# Altium PCB main.pcbdoc
Units mm, origin at the board's own origin, x right, y up, seen from the top; angles counter-clockwise.
Board outline 58 x 50 mm, 4 copper layers (Top Layer, GND, PWR, Bottom Layer), stack 1.586 mm thick; 85 components, 36 nets, 360 pads, 293 vias.
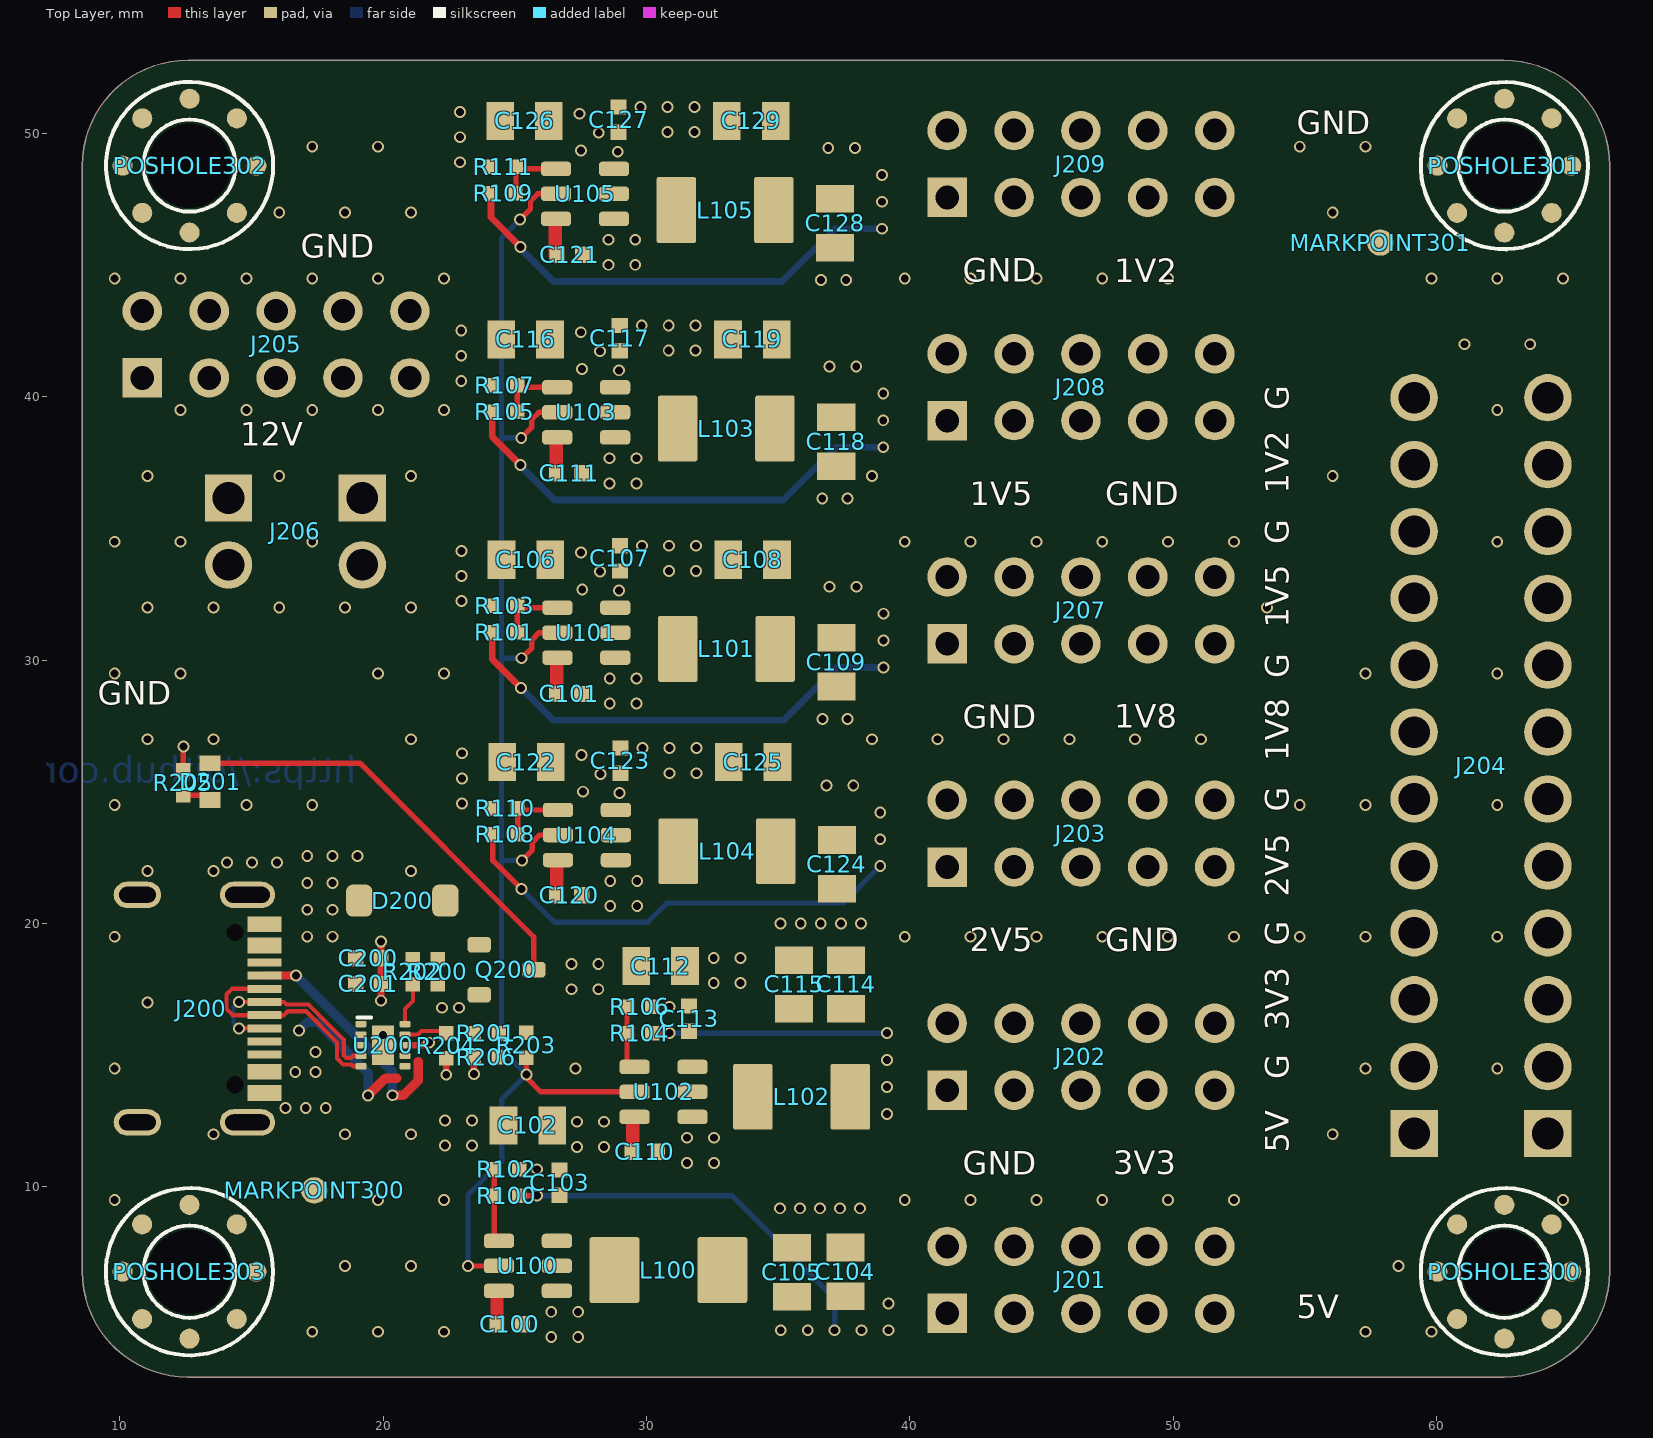
[diagram p0: Top Layer view]
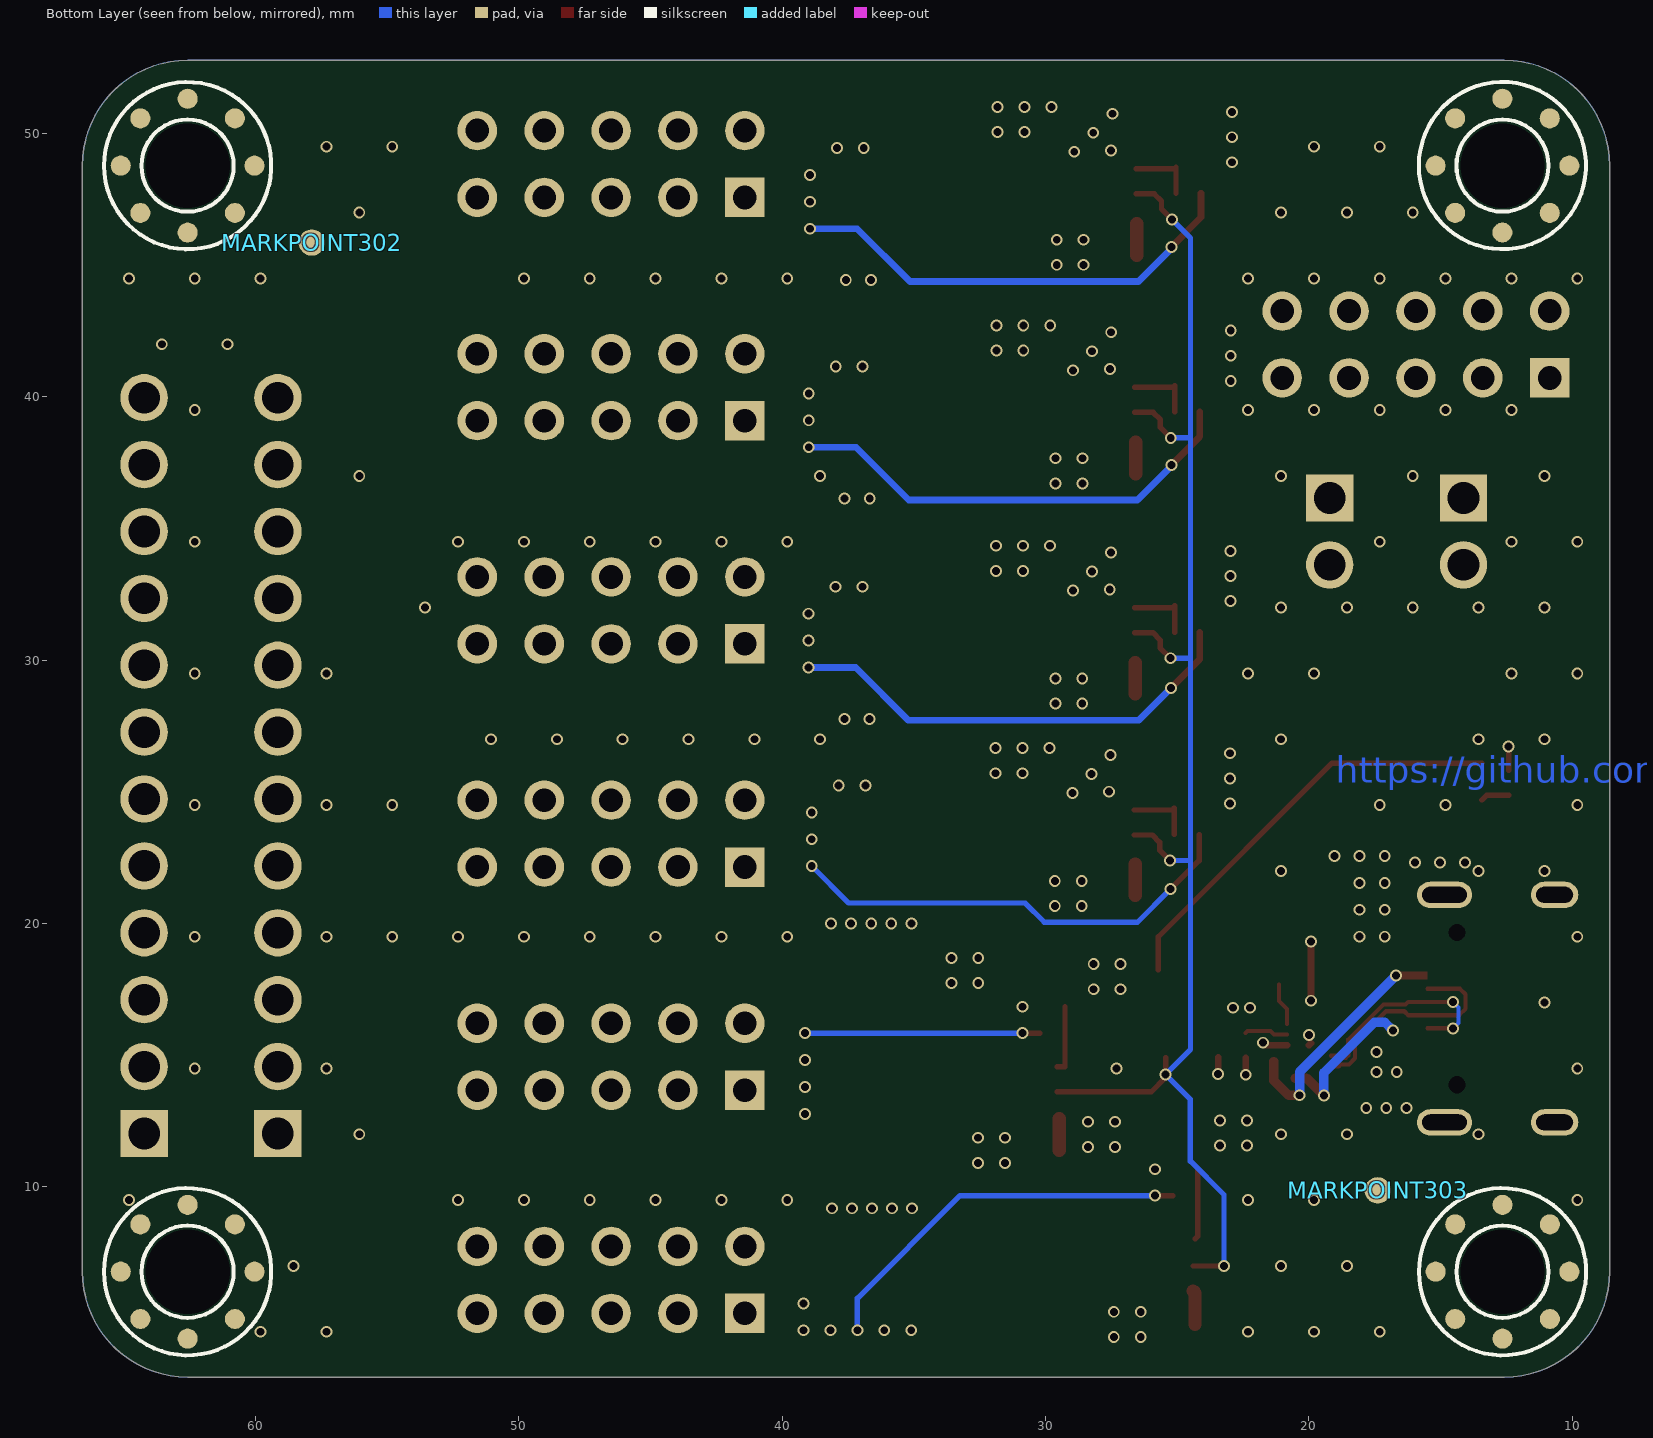
[diagram p1: Bottom Layer view, seen from below]
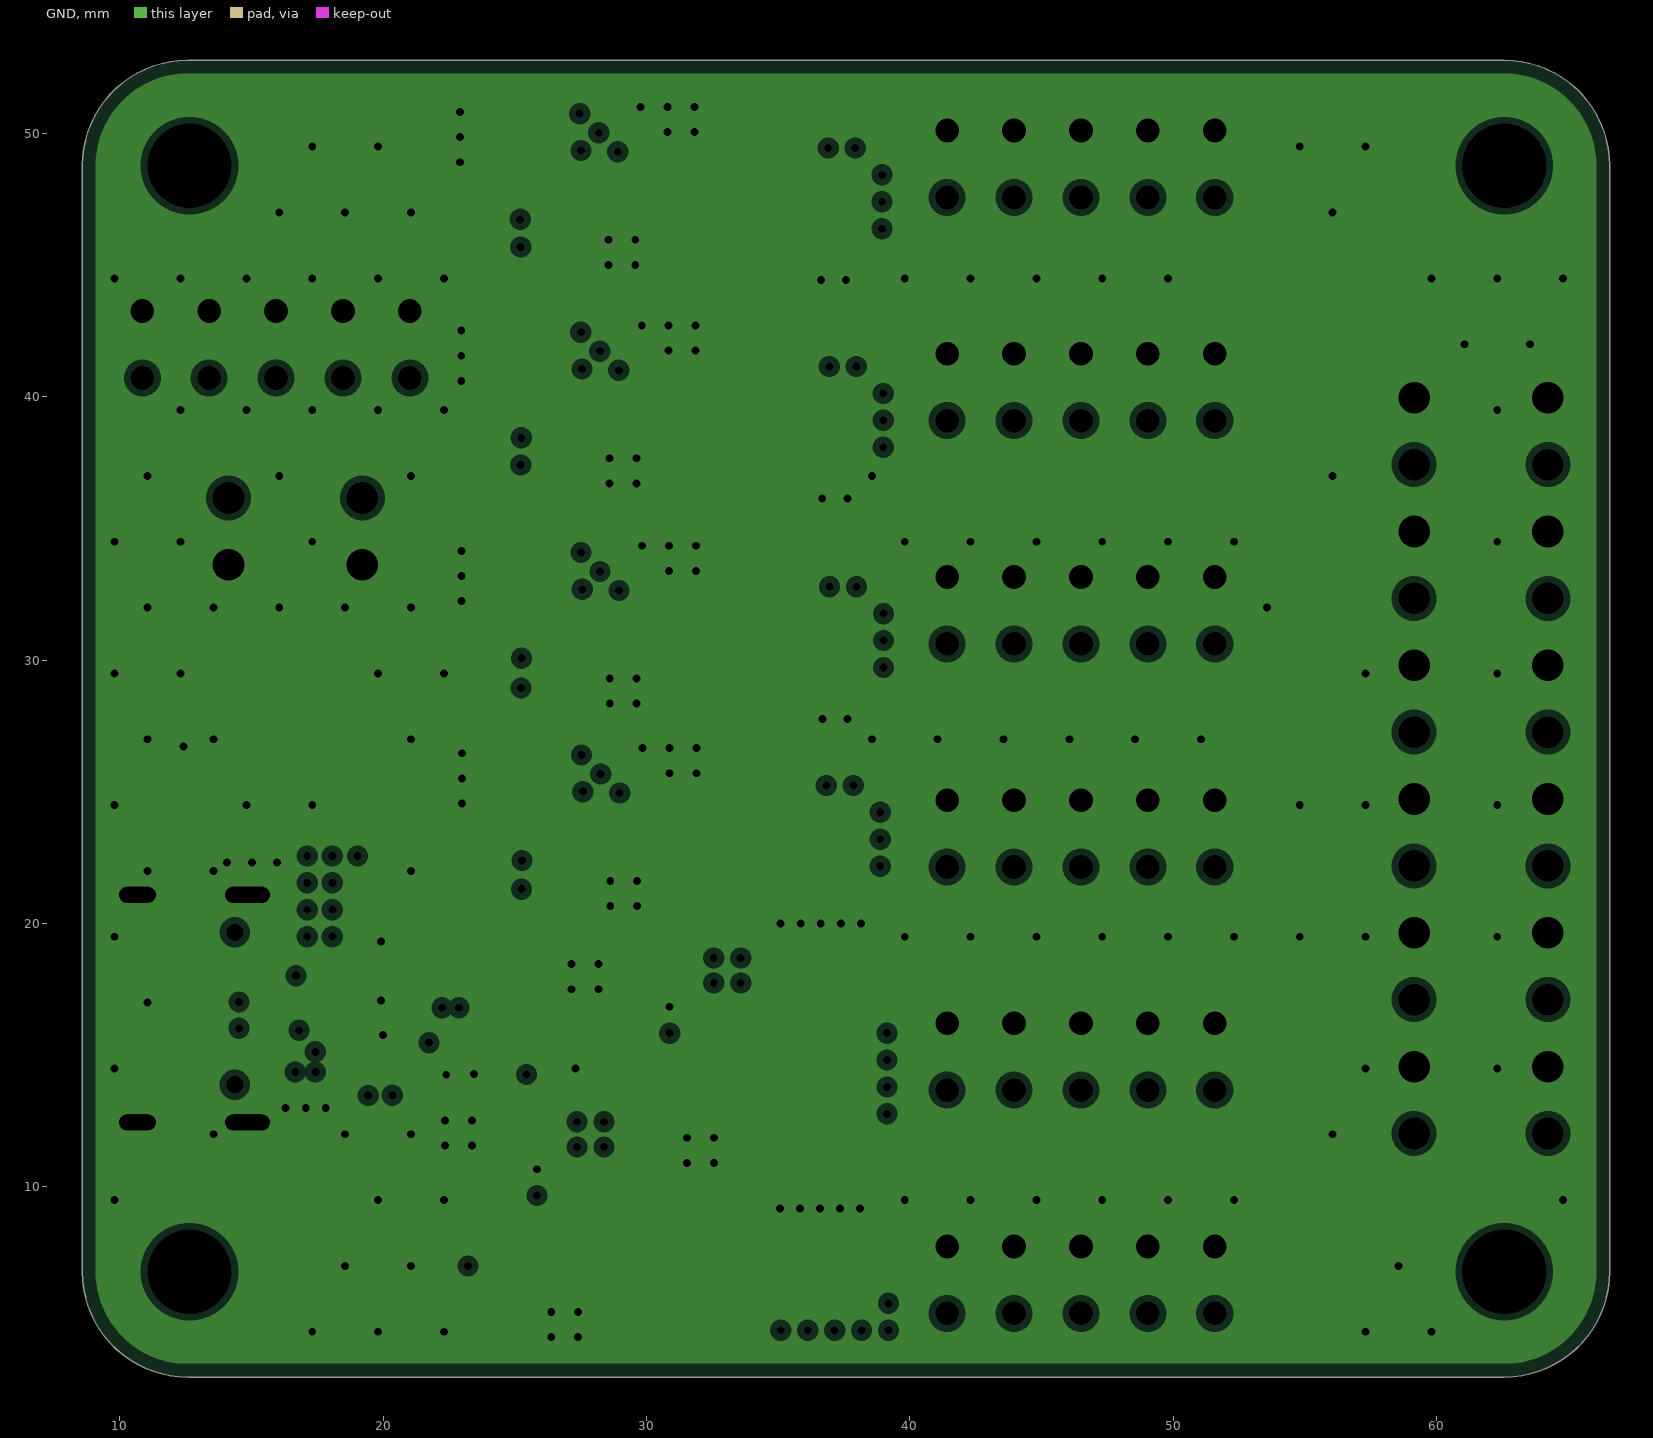
[diagram p2: GND, clearances drawn from the general rule]
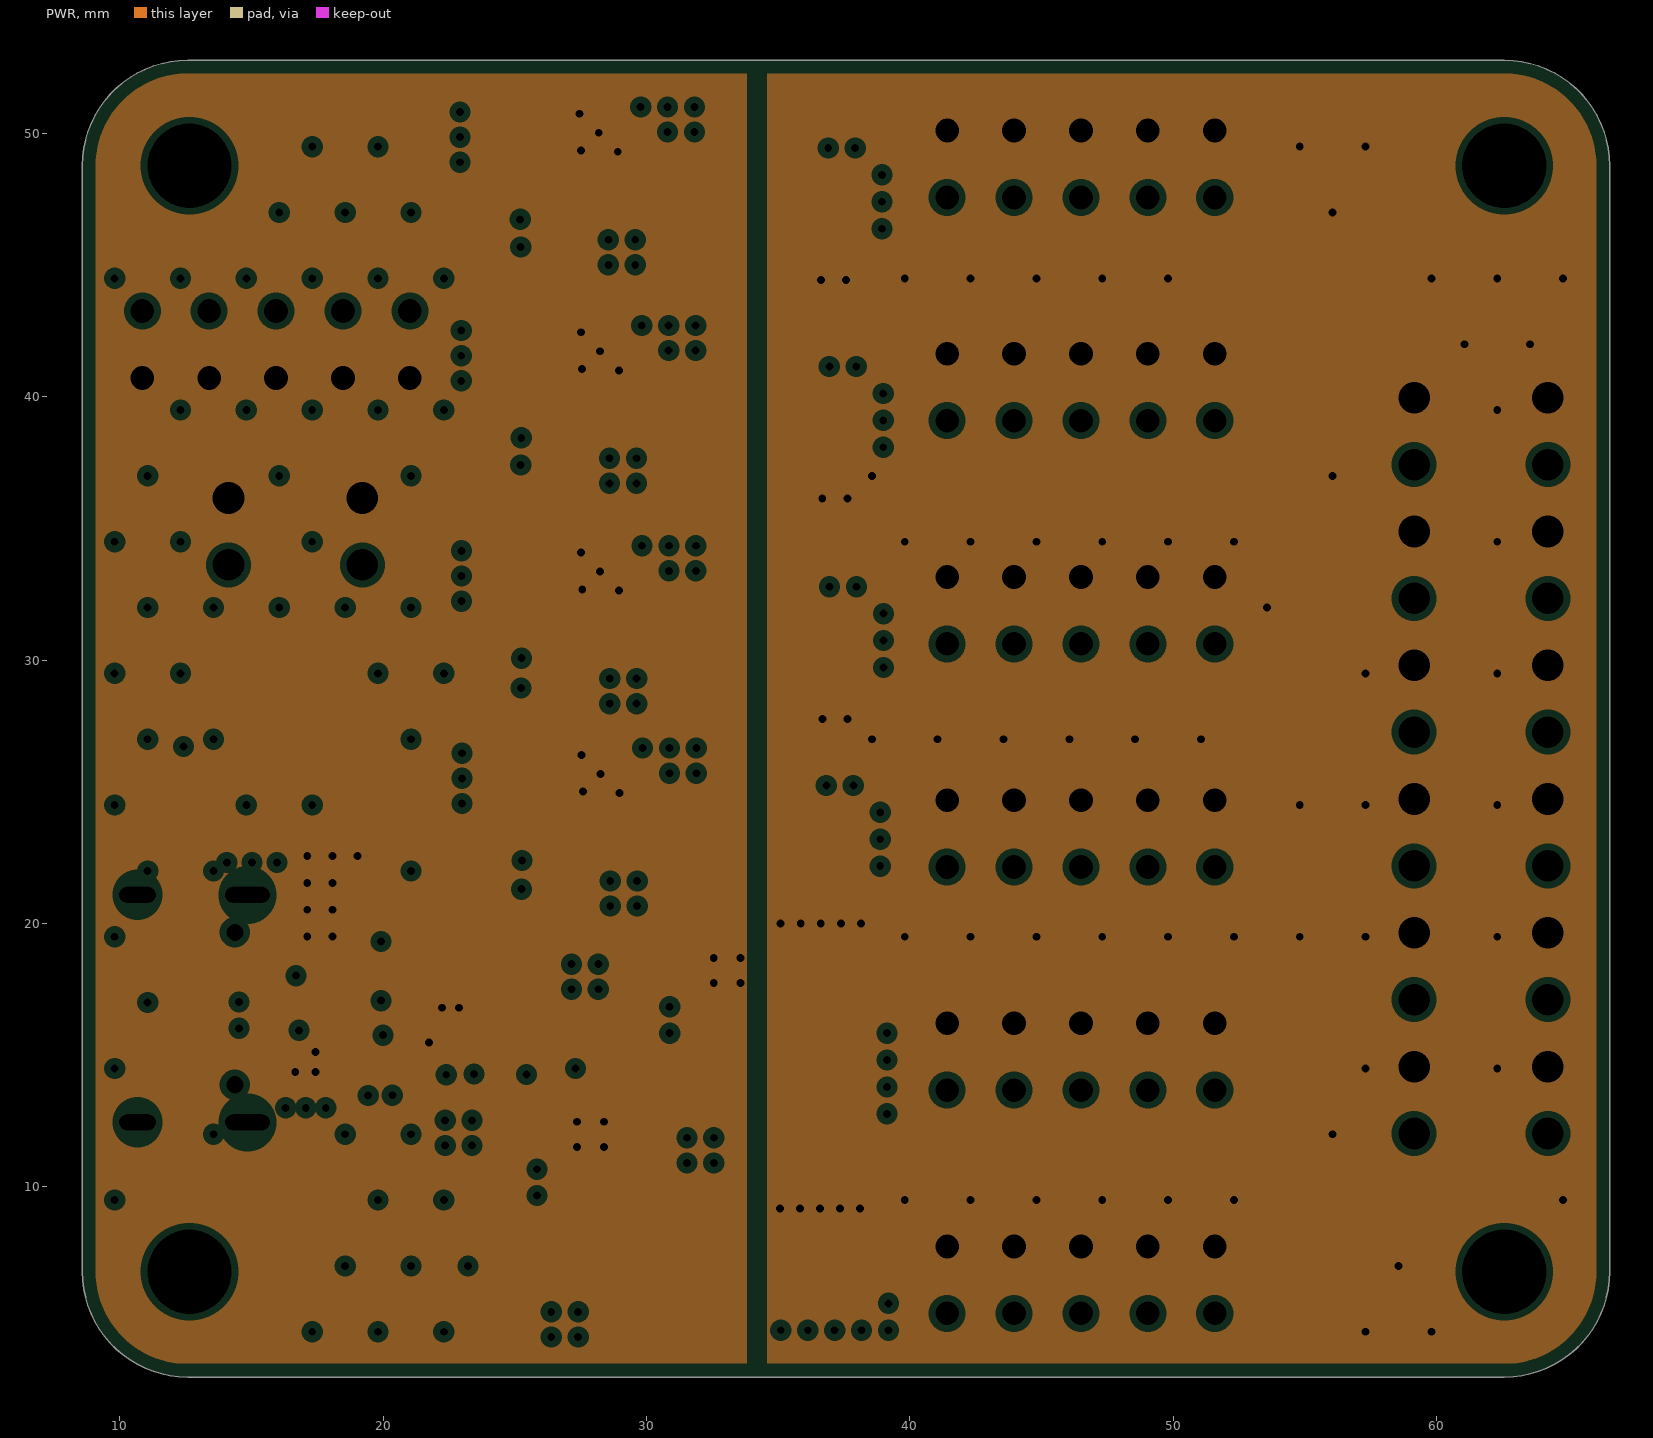
[diagram p3: PWR, clearances drawn from the general rule]

## Layer stack, top to bottom
Top Solder: solder mask 0.0102, Solder Resist, Dk 3.5
Top Layer: signal copper 0.035
Dielectric 2: prepreg 0.2104, PP-022, Dk 4.5
GND: plane copper 0.0152, net GND
Dielectric 1: core 1.065, Core-042, Dk 4.6
PWR: plane copper 0.0152, net GND
Dielectric 3: prepreg 0.2104, PP-022, Dk 4.5
Bottom Layer: signal copper 0.035
Bottom Solder: solder mask 0.0102, Solder Resist, Dk 3.5

## Board outline
8.576,6.782 8.576,48.782 cw(c12.576,48.782) 12.576,52.782 62.576,52.782 cw(c62.576,48.782) 66.576,48.782 66.576,6.782 cw(c62.576,6.782) 62.576,2.782 12.576,2.782 cw(c12.576,6.782)

## Design rules (kind name [scope] priority, off if disabled: settings)
AssemblyTestPointUsage [All] p0: scope1count=1 scope1_0_kind=Board scope1_0_value=Board scope2count=1 scope2_0_kind=Board scope2_0_value=Board commentlength=0
AssemblyTestPointUsage [All] p1: isadvanced=TRUE
AssemblyTestpoint [All] p0: scope1count=1 scope1_0_kind=Board scope1_0_value=Board scope2count=1 scope2_0_kind=Board scope2_0_value=Board commentlength=0
AssemblyTestpoint [All] p1: isadvanced=TRUE testpointundercomponent=TRUE minsize=1.016 maxsize=2.54 preferedsize=1.524 minholesize=0 maxholesize=1.016 preferedholesize=0.813 testpointgrid=0.025 usegrid=TRUE gridtolerance=0 allowsidetop=TRUE allowsidebottom=TRUE
BoardOutlineClearance BoardOutlineClearance_1 [All] p0: scope1count=1 scope1_0_kind=Board scope1_0_value=Board scope2count=1 scope2_0_kind=Board scope2_0_value=Board commentlength=0 gap=0.2
BoardOutlineClearance BoardOutlineClearance_1 [All] p1: isadvanced=TRUE gap=0.2 ignorepadtopadclearanceinfootprint=FALSE
Clearance "" [All] p0: scope1count=1 scope1_0_kind=Board scope1_0_value=Board scope2count=1 scope2_0_kind=Board scope2_0_value=Board commentlength=0
Clearance Clearance_3 [InPolygon] p1: scope1count=1 scope1_0_kind=Board scope1_0_value=Board scope2count=1 scope2_0_kind=Board scope2_0_value=Board commentlength=0 allowed="FALSE / RECORD=DXPRule" id=0 isadvanced=TRUE gap=0.381 ignorepadtopadclearanceinfootprint=FALSE
Clearance Clearance_1 [OnMid vs OnMid] p2: scope1count=1 scope1_0_kind=Board scope1_0_value=Board scope2count=1 scope2_0_kind=Board scope2_0_value=Board commentlength=0 id=0 gap=0.1 ignorepadtopadclearanceinfootprint=FALSE except(0.089: Arc-Arc Arc-Track Arc-Text Track-Track Track-Text Text-Text Hole-Hole) sourcerule=52 cellrowname=All cellrowtype=0 cellcolname=All cellcoltype=0 innerlayers=TRUE
Clearance Clearance_2 [(ExistsOnLayer('Top Layer') Or ExistsOnLayer('Bottom Layer')) vs (ExistsOnLayer('Top Layer') Or ExistsOnLayer('Bottom Layer'))] p3: scope1count=1 scope1_0_kind=Board scope1_0_value=Board scope2count=1 scope2_0_kind=Board scope2_0_value=Board commentlength=0 id=0 gap=0.1 ignorepadtopadclearanceinfootprint=FALSE except(0.089: Arc-Arc Arc-Track Arc-Text Track-Track Track-Text Text-Text Hole-Hole) sourcerule=52 cellrowname=All cellrowtype=0 cellcolname=All cellcoltype=0 outerlayers=TRUE
Clearance [All] p4: scope1count=1 scope1_0_kind=Board scope1_0_value=Board scope2count=1 scope2_0_kind=Board scope2_0_value=Board commentlength=0 id=0 gap=0.254 ignorepadtopadclearanceinfootprint=FALSE ismatrix=TRUE
ComponentClearance [All] p0 off: scope1count=1 scope1_0_kind=Board scope1_0_value=Board scope2count=1 scope2_0_kind=Board scope2_0_value=Board commentlength=0 gap=0 collisioncheckmode=3
ComponentClearance [All] p1 off: isadvanced=TRUE gap=0 collisioncheckmode=3 verticalgap=0.254 showdistances=FALSE
DiffPairsRouting DifferentialPairsRouting_1 [All] p0 off: scope1count=1 scope1_0_kind=Board scope1_0_value=Board scope2count=1 scope2_0_kind=Board scope2_0_value=Board commentlength=69 // Protel DXP Scope 1 Expression Was: InDifferentialPairClass('USB')
DiffPairsRouting [All] p0: scope1count=1 scope1_0_kind=Board scope1_0_value=Board scope2count=1 scope2_0_kind=Board scope2_0_value=Board commentlength=0
DiffPairsRouting DifferentialPairsRouting_1 [InDifferentialPairClass('USB')] p1: maxlimit=0.095 minlimit=0.095 mostfreqgap=0.095 toplayer_minwidth=0.16 toplayer_maxwidth=0.16 toplayer_prefwidth=0.16 bottomlayer_minwidth=0.16 bottomlayer_maxwidth=0.16 bottomlayer_prefwidth=0.16 impedanceprofiledriven=TRUE impedanceprofileid={5BC8230A-77DA-4D98-BB56-6723C76F3465} impedanceprofilevalue=90.000000 maxuncoupledlength=0.254
DiffPairsRouting [All] p2: maxlimit=0.254 minlimit=0.254 mostfreqgap=0.254 toplayer_minwidth=0.381 toplayer_maxwidth=0.381 toplayer_prefwidth=0.381 bottomlayer_minwidth=0.381 bottomlayer_maxwidth=0.381 bottomlayer_prefwidth=0.381 maxuncoupledlength=12.7
FabricationTestPointUsage [All] p0: scope1count=1 scope1_0_kind=Board scope1_0_value=Board scope2count=1 scope2_0_kind=Board scope2_0_value=Board commentlength=0 valid=0 allowmultiple=FALSE
FabricationTestPointUsage [All] p1: isadvanced=TRUE valid=0 allowmultiple=FALSE
FabricationTestpoint [All] p0: scope1count=1 scope1_0_kind=Board scope1_0_value=Board scope2count=1 scope2_0_kind=Board scope2_0_value=Board commentlength=0 side=3 testpointundercomponent=TRUE minsize=1.016 maxsize=2.54 preferedsize=1.524 minholesize=0 maxholesize=1.016 preferedholesize=0.813 testpointgrid=0.025
FabricationTestpoint [All] p1: isadvanced=TRUE side=3 testpointundercomponent=TRUE minsize=1.016 maxsize=2.54 preferedsize=1.524 minholesize=0 maxholesize=1.016 preferedholesize=0.813 testpointgrid=0.025 allowsidetop=TRUE allowsidebottom=TRUE usegrid=TRUE gridtolerance=0
FanoutControl Fanout_BGA [All] p0 off: scope1count=1 scope1_0_kind=Board scope1_0_value=Board scope2count=1 scope2_0_kind=Board scope2_0_value=Board commentlength=69 // Protel DXP Scope 1 Expression Was: IsBGA   Fanout_BGA (Default Rule)
FanoutControl Fanout_LCC [All] p0 off: scope1count=1 scope1_0_kind=Board scope1_0_value=Board scope2count=1 scope2_0_kind=Board scope2_0_value=Board commentlength=69 // Protel DXP Scope 1 Expression Was: IsLCC   Fanout_LCC (Default Rule)
FanoutControl Fanout_SOIC [All] p0 off: scope1count=1 scope1_0_kind=Board scope1_0_value=Board scope2count=1 scope2_0_kind=Board scope2_0_value=Board commentlength=71 // Protel DXP Scope 1 Expression Was: IsSOIC   Fanout_SOIC (Default Rule)
FanoutControl Fanout_Small [All] p0 off: scope1count=1 scope1_0_kind=Board scope1_0_value=Board scope2count=1 scope2_0_kind=Board scope2_0_value=Board commentlength=84 // Protel DXP Scope 1 Expression Was: (CompPinCount < 5)   Fanout_Small (Default Rule)
FanoutControl Fanout_Default [All] p0: scope1count=1 scope1_0_kind=Board scope1_0_value=Board scope2count=1 scope2_0_kind=Board scope2_0_value=Board commentlength=30 // Fanout_Default (Default Rule)
FanoutControl Fanout_BGA [IsBGA] p1: isadvanced=TRUE bgadir=Out bgaviamode=Centered fanoutstyle=Auto fanoutdirection=Alternating viagrid=0.025 // Fanout_BGA (Default Rule)
FanoutControl Fanout_LCC [IsLCC] p2: isadvanced=TRUE bgadir=Out bgaviamode=Centered fanoutstyle=Auto fanoutdirection=Alternating viagrid=0.025 // Fanout_LCC (Default Rule)
FanoutControl Fanout_SOIC [IsSOIC] p3: isadvanced=TRUE bgadir=Out bgaviamode=Centered fanoutstyle=Auto fanoutdirection=Alternating viagrid=0.025 // Fanout_SOIC (Default Rule)
FanoutControl Fanout_Small [(CompPinCount < 5)] p4: isadvanced=TRUE bgadir=Out bgaviamode=Centered fanoutstyle=Auto fanoutdirection=OutThenIn viagrid=0.025 // Fanout_Small (Default Rule)
FanoutControl Fanout_Default [All] p5: isadvanced=TRUE bgadir=Out bgaviamode=Centered fanoutstyle=Auto fanoutdirection=Alternating viagrid=0.025 // Fanout_Default (Default Rule)
Height [All] p0 off: scope1count=1 scope1_0_kind=Board scope1_0_value=Board scope2count=1 scope2_0_kind=Board scope2_0_value=Board commentlength=0
Height [All] p1 off: isadvanced=TRUE minheight=0 maxheight=25.4 prefheight=12.7
HoleSize [All] p0: scope1count=1 scope1_0_kind=Board scope1_0_value=Board scope2count=1 scope2_0_kind=Board scope2_0_value=Board commentlength=0 absolutevalues=TRUE maxlimit=6.5 minlimit=0.3 maxpercent=80.000 minpercent=20.000
HoleSize [All] p1: isadvanced=TRUE absolutevalues=TRUE maxlimit=6.5 minlimit=0.3 maxpercent=80.000 minpercent=20.000
HoleToHoleClearance [All] p0: scope1count=1 scope1_0_kind=Board scope1_0_value=Board scope2count=1 scope2_0_kind=Board scope2_0_value=Board commentlength=0
HoleToHoleClearance [All] p1: isadvanced=TRUE gap=0.15 allowstackedmicrovias=TRUE
LayerPairs [All] p0: scope1count=1 scope1_0_kind=Board scope1_0_value=Board scope2count=1 scope2_0_kind=Board scope2_0_value=Board commentlength=0 enforce=TRUE
LayerPairs [All] p1: isadvanced=TRUE enforce=TRUE
MatchedLengths MatchedLengths_2 [All] p0 off: scope1count=1 scope1_0_kind=Board scope1_0_value=Board scope2count=1 scope2_0_kind=Board scope2_0_value=Board commentlength=69 tolerance=0.254 amplitude=5.08 gap=0.508 style=90-Degree // Protel DXP Scope 1 Expression Was: InDifferentialPairClass('USB')
MatchedLengths MatchedLengths_1 [All] p0 off: scope1count=1 scope1_0_kind=NetClass scope1_0_value=NewClassCC scope2count=1 scope2_0_kind=Board scope2_0_value=Board commentlength=0 tolerance=1.27 amplitude=5.08 gap=0.508 style=90-Degree
MatchedLengths MatchedLengths_1 [InNetClass('NewClassCC')] p1 off: isadvanced=TRUE tolerance=1.27 checknetsindiffpair=FALSE checkdiffpairvsdiffpair=TRUE checkxsignals=TRUE checkothers=TRUE
MatchedLengths MatchedLengths_2 [InDifferentialPairClass('USB')] p2: tolerance=0.254 checknetsindiffpair=TRUE checkdiffpairvsdiffpair=FALSE checkxsignals=FALSE checkothers=FALSE
MinimumAnnularRing MinimumAnnularRing_1 [All] p0: scope1count=1 scope1_0_kind=Board scope1_0_value=Board scope2count=1 scope2_0_kind=Board scope2_0_value=Board commentlength=0 minimumring=0.05
MinimumAnnularRing MinimumAnnularRing_1 [All] p1: isadvanced=TRUE minimumring=0.05
MinimumSolderMaskSliver [All] p0: scope1count=1 scope1_0_kind=Board scope1_0_value=Board scope2count=1 scope2_0_kind=Board scope2_0_value=Board commentlength=0
MinimumSolderMaskSliver [All] p1: isadvanced=TRUE minsoldermaskwidth=0.1
NetAntennae [All] p0: scope1count=1 scope1_0_kind=Board scope1_0_value=Board scope2count=1 scope2_0_kind=Board scope2_0_value=Board commentlength=0
NetAntennae [All] p1: isadvanced=TRUE netantennaetolerance=0
PasteMaskExpansion [All] p0: scope1count=1 scope1_0_kind=Board scope1_0_value=Board scope2count=1 scope2_0_kind=Board scope2_0_value=Board commentlength=0 expansion=0
PasteMaskExpansion [All] p1: isadvanced=TRUE expansion=0
PlaneClearance [All] p0: scope1count=1 scope1_0_kind=Board scope1_0_value=Board scope2count=1 scope2_0_kind=Board scope2_0_value=Board commentlength=0 clearance=0.254
PlaneClearance [All] p1: isadvanced=TRUE clearance=0.254
PlaneConnect [All] p0: scope1count=1 scope1_0_kind=Board scope1_0_value=Board scope2count=1 scope2_0_kind=Board scope2_0_value=Board commentlength=0 planeconnectstyle=Direct reliefexpansion=0.508 reliefentries=4 reliefconductorwidth=0.254 reliefairgap=0.254
PlaneConnect [All] p1: isadvanced=TRUE planeconnectstyle=Direct reliefexpansion=0.508 reliefentries=4 reliefconductorwidth=0.254 reliefairgap=0.254
PolygonConnect [All] p0: scope1count=1 scope1_0_kind=Board scope1_0_value=Board scope2count=1 scope2_0_kind=Board scope2_0_value=Board commentlength=0 connectstyle=Direct reliefconductorwidth=0.254 reliefentries=4 polygonreliefangle="90 Angle"
PolygonConnect [All] p1: connectstyle=Direct reliefconductorwidth=0.254 reliefentries=4 polygonreliefangle="90 Angle" airgapwidth=0.254
RoutingCorners [All] p0: scope1count=1 scope1_0_kind=Board scope1_0_value=Board scope2count=1 scope2_0_kind=Board scope2_0_value=Board commentlength=0 cornerstyle=45-Degree minsetback=2.54 maxsetback=2.54
RoutingCorners [All] p1: isadvanced=TRUE cornerstyle=45-Degree minsetback=2.54 maxsetback=2.54
RoutingLayers [All] p0: scope1count=1 scope1_0_kind=Board scope1_0_value=Board scope2count=1 scope2_0_kind=Board scope2_0_value=Board commentlength=0 top layer=Automatic bottom layer=Automatic
RoutingPriority [All] p0: scope1count=1 scope1_0_kind=Board scope1_0_value=Board scope2count=1 scope2_0_kind=Board scope2_0_value=Board commentlength=0
RoutingPriority [All] p1: isadvanced=TRUE routingpriority=0
RoutingTopology [All] p0: scope1count=1 scope1_0_kind=Board scope1_0_value=Board scope2count=1 scope2_0_kind=Board scope2_0_value=Board commentlength=0 topology=Shortest
RoutingVias RoutingViaStyle_1 [All] p0: scope1count=1 scope1_0_kind=Board scope1_0_value=Board scope2count=1 scope2_0_kind=Board scope2_0_value=Board commentlength=0 holewidth=0.3 width=0.45 viastyle="Through Hole" minholewidth=0.3 minwidth=0.45 maxholewidth=0.3 maxwidth=0.45
RoutingVias RoutingViaStyle_1 [All] p1: holewidth=0.3 width=0.45 viastyle="Through Hole" minholewidth=0.3 minwidth=0.45 maxholewidth=0.3 maxwidth=0.45
ShortCircuit [All] p1: isadvanced=TRUE allowed=FALSE
SilkToBoardRegionClearance [All] p0: scope1count=1 scope1_0_kind=Board scope1_0_value=Board scope2count=1 scope2_0_kind=Board scope2_0_value=Board commentlength=0
SilkToSilkClearance [All] p0 off: scope1count=1 scope1_0_kind=Board scope1_0_value=Board scope2count=1 scope2_0_kind=Board scope2_0_value=Board commentlength=0
SilkToSilkClearance [All] p1 off: isadvanced=TRUE silktosilkclearance=0.254
SilkToSolderMaskClearance [All] p0 off: scope1count=1 scope1_0_kind=Board scope1_0_value=Board scope2count=1 scope2_0_kind=Board scope2_0_value=Board commentlength=44 // Protel DXP Scope 1 Expression Was: IsPad
SilkToSolderMaskClearance [IsPad] p1: isadvanced=TRUE minsilkscreentomaskgap=0 clearancetoexposedcopper=FALSE
SolderMaskExpansion SolderMaskExpansion_1 [All] p0 off: scope1count=1 scope1_0_kind=Board scope1_0_value=Board scope2count=1 scope2_0_kind=Board scope2_0_value=Board commentlength=44 expansion=0 // Protel DXP Scope 1 Expression Was: IsVia
SolderMaskExpansion [All] p0: scope1count=1 scope1_0_kind=Board scope1_0_value=Board scope2count=1 scope2_0_kind=Board scope2_0_value=Board commentlength=0 expansion=0
SolderMaskExpansion SolderMaskExpansion_1 [IsVia] p1: isadvanced=TRUE expansion=0 istentingtop=TRUE useseparateexpansions=TRUE expansionbottom=0 istentingbottom=TRUE
SolderMaskExpansion [All] p2: isadvanced=TRUE expansion=0 istentingtop=FALSE
SupplyNets "Schematic Supply Nets_7" [All] p0: scope1count=1 scope1_0_kind=Net scope1_0_value=GND scope2count=1 scope2_0_kind=Board scope2_0_value=Board commentlength=0 voltage=0.000
SupplyNets "Schematic Supply Nets_6" [All] p0: scope1count=1 scope1_0_kind=Net scope1_0_value=VBUS scope2count=1 scope2_0_kind=Board scope2_0_value=Board commentlength=0 voltage=12.00
SupplyNets "Schematic Supply Nets_5" [All] p0: scope1count=1 scope1_0_kind=Net scope1_0_value=+2V5 scope2count=1 scope2_0_kind=Board scope2_0_value=Board commentlength=0 voltage=2.500
SupplyNets "Schematic Supply Nets_4" [All] p0: scope1count=1 scope1_0_kind=Net scope1_0_value=+1V2 scope2count=1 scope2_0_kind=Board scope2_0_value=Board commentlength=0 voltage=1.200
SupplyNets "Schematic Supply Nets_3" [All] p0: scope1count=1 scope1_0_kind=Net scope1_0_value=+1V8 scope2count=1 scope2_0_kind=Board scope2_0_value=Board commentlength=0 voltage=1.800
SupplyNets "Schematic Supply Nets_2" [All] p0: scope1count=1 scope1_0_kind=Net scope1_0_value=+5V scope2count=1 scope2_0_kind=Board scope2_0_value=Board commentlength=0 voltage=5.000
SupplyNets "Schematic Supply Nets_1" [All] p0: scope1count=1 scope1_0_kind=Net scope1_0_value=+3V3 scope2count=1 scope2_0_kind=Board scope2_0_value=Board commentlength=0 voltage=3.300
SupplyNets "Schematic Supply Nets" [All] p0: scope1count=1 scope1_0_kind=Net scope1_0_value=+1V5 scope2count=1 scope2_0_kind=Board scope2_0_value=Board commentlength=0 voltage=1.500
SupplyNets "Schematic Supply Nets_7" [InNet('GND')] p1: isadvanced=TRUE voltage=0.000
SupplyNets "Schematic Supply Nets_6" [InNet('VBUS')] p2: isadvanced=TRUE voltage=12.00
SupplyNets "Schematic Supply Nets_5" [InNet('+2V5')] p3: isadvanced=TRUE voltage=2.500
SupplyNets "Schematic Supply Nets_4" [InNet('+1V2')] p4: isadvanced=TRUE voltage=1.200
SupplyNets "Schematic Supply Nets_3" [InNet('+1V8')] p5: isadvanced=TRUE voltage=1.800
SupplyNets "Schematic Supply Nets_2" [InNet('+5V')] p6: isadvanced=TRUE voltage=5.000
SupplyNets "Schematic Supply Nets_1" [InNet('+3V3')] p7: isadvanced=TRUE voltage=3.300
SupplyNets "Schematic Supply Nets" [InNet('+1V5')] p8: isadvanced=TRUE voltage=1.500
UnRoutedNet [All] p0: scope1count=1 scope1_0_kind=Board scope1_0_value=Board scope2count=1 scope2_0_kind=Board scope2_0_value=Board commentlength=0
UnRoutedNet [All] p1: isadvanced=TRUE
UnpouredPolygon [All] p0: scope1count=1 scope1_0_kind=Board scope1_0_value=Board scope2count=1 scope2_0_kind=Board scope2_0_value=Board commentlength=0
UnpouredPolygon [All] p1: isadvanced=TRUE
Width MaxMinWidth_1 [All] p0: scope1count=1 scope1_0_kind=Board scope1_0_value=Board scope2count=1 scope2_0_kind=Board scope2_0_value=Board commentlength=0 maxlimit=5454.608 minlimit=0.089 preferedwidth=0.152
Width [All] p0: scope1count=1 scope1_0_kind=NetClass scope1_0_value=NewClassCC scope2count=1 scope2_0_kind=Board scope2_0_value=Board commentlength=0 maxlimit=0.358 minlimit=0.358 preferedwidth=0.358
Width [InNetClass('NewClassCC')] p1: maxlimit=0.358 minlimit=0.358 preferedwidth=0.358 impedanceprofiledriven=TRUE impedanceprofileid={E49A0EDE-DB8A-417C-8989-1AAEC2FE40F3} impedanceprofilevalue=50.000000 minimp=50.000000 maximp=50.000000 favimp=50.000000
Width MaxMinWidth_1 [All] p2: maxlimit=5454.608 minlimit=0.089 preferedwidth=0.152 minimp=50.000000 maximp=50.000000 favimp=50.000000
3 further rules are at their usual default settings.

## Classes and differential pairs
net class NewClassCC: NetJ200_A5 NetJ200_B5
net class NewClassPWR: +1V2 +1V5 +1V8 +2V5 +3V3 +5V GND VBUS
component class sockets: C200 C201 D200 D201 J200 J201 J202 J203 J204 J205 J206 J207 J208 J209 Q200 R200 R201 R202 R203 R204 R205 R206 U200
component class misc: MARKPOINT300 MARKPOINT301 MARKPOINT302 MARKPOINT303 POSHOLE300 POSHOLE301 POSHOLE302 POSHOLE303
component class converter: C100 C101 C102 C103 C104 C105 C106 C107 C108 C109 C110 C111 C112 C113 C114 C115 C116 C117 C118 C119 C120 C121 C122 C123 C124 C125 C126 C127 C128 C129 L100 L101 L102 L103 L104 L105 R100 R101 R102 R103 R104 R105 R106 R107 R108 R109 R110 R111 U100 U101 U102 U103 U104 U105

## Components (designator, comment, footprint, x,y, rotation, side; value= is the part's Value field where it differs from the comment)
C100 "C-NOMO" C0402 24.801,4.785 r0 top
C101 "C-NOMO" C0402 27.067,28.722 r0 top
C102 "C-NOMO" C0805 25.497,12.335 r0 top
C103 "C-NOMO" C0402 26.697,10.168 r270 top
C104 "C-NOMO" C0805 37.551,6.777 r270 top
C105 "C-NOMO" C0805 35.523,6.76 r270 top
C106 "C-NOMO" C0805 25.421,33.819 r0 top
C107 "C-NOMO" C0402 28.992,33.869 r270 top
C108 "C-NOMO" C0805 34.03,33.819 r0 top
C109 "C-NOMO" C0805 37.211,29.931 r90 top
C110 "C-NOMO" C0402 29.938,11.342 r0 top
C111 "C-NOMO" C0402 27.067,37.096 r0 top
C112 "C-NOMO" C0805 30.537,18.389 r0 top
C113 "C-NOMO" C0402 31.618,16.389 r270 top
C114 "C-NOMO" C0805 37.581,17.689 r270 top
C115 "C-NOMO" C0805 35.604,17.689 r270 top
C116 "C-NOMO" C0805 25.413,42.184 r0 top
C117 "C-NOMO" C0402 28.984,42.234 r270 top
C118 "C-NOMO" C0805 37.203,38.296 r90 top
C119 "C-NOMO" C0805 34.022,42.184 r0 top
C120 "C-NOMO" C0402 27.067,21.072 r0 top
C121 "C-NOMO" C0402 27.093,45.394 r0 top
C122 "C-NOMO" C0805 25.442,26.134 r0 top
C123 "C-NOMO" C0402 29.013,26.184 r270 top
C124 "C-NOMO" C0805 37.232,22.247 r90 top
C125 "C-NOMO" C0805 34.051,26.134 r0 top
C126 "C-NOMO" C0805 25.37,50.482 r0 top
C127 "C-NOMO" C0402 28.94,50.532 r270 top
C128 "C-NOMO" C0805 37.16,46.594 r90 top
C129 "C-NOMO" C0805 33.978,50.482 r0 top
C200 "C-NOMO" C0402 19.435,18.689 r180 top
C201 "C-NOMO" C0402 19.437,17.708 r180 top
D200 "MMSZ4688" MMSZ4688 20.728,20.873 r0 top
D201 "LED" LED0603 13.429,25.392 r90 top
J200 "USB-C-16" USB-C-16 13.084,16.773 r270 top
J201 "HDR2X5" HDR2X5 46.497,6.47 r0 top
J202 "HDR2X5" HDR2X5 46.497,14.944 r0 top
J203 "HDR2X5" HDR2X5 46.497,23.419 r0 top
J204 "HDR1X12" KF141R-2.54-12P 61.689,26.001 r90 top
J205 "HDR2X5" HDR2X5 15.935,41.99 r0 top
J206 "HDR1X2" KF141R-2.54-2P 16.669,34.89 r270 top
J207 "HDR2X5" HDR2X5 46.497,31.894 r0 top
J208 "HDR2X5" HDR2X5 46.497,40.368 r0 top
J209 "HDR2X5" HDR2X5 46.497,48.843 r0 top
L100 "L" FXL0530 30.833,6.844 r0 top
L101 "L" FXL0420 33.038,30.433 r0 top
L102 "L" FXL0420 35.889,13.425 r0 top
L103 "L" FXL0420 33.03,38.798 r0 top
L104 "L" FXL0420 33.059,22.749 r0 top
L105 "L" FXL0420 32.986,47.096 r0 top
MARKPOINT300 "MARKPOINT" MARKPOINT-1.0#1 17.385,9.872 r90 top
MARKPOINT301 "MARKPOINT" MARKPOINT-1.0#1 57.862,45.86 r90 top
MARKPOINT302 "MARKPOINT" MARKPOINT-1.0#2 57.862,45.86 r90 bottom
MARKPOINT303 "MARKPOINT" MARKPOINT-1.0#2 17.385,9.872 r90 bottom
POSHOLE300 "POSHOLE" POSHOLE-3.2 62.576,6.782 r90 top
POSHOLE301 "POSHOLE" POSHOLE-3.2 62.576,48.781 r90 top
POSHOLE302 "POSHOLE" POSHOLE-3.2 12.649,48.782 r90 top
POSHOLE303 "POSHOLE" POSHOLE-3.2 12.646,6.782 r90 top
Q200 "HL2301A" HL2301A 24.682,18.251 r0 top
R100 "R" R0402 24.697,9.668 r0 top
R101 "R" R0402 24.621,31.069 r180 top
R102 "R" R0402 24.697,10.668 r180 top
R103 "R" R0402 24.621,32.069 r0 top
R104 "R" R0402 29.737,15.838 r0 top
R105 "R" R0402 24.613,39.434 r180 top
R106 "R" R0402 29.737,16.838 r180 top
R107 "R" R0402 24.613,40.434 r0 top
R108 "R" R0402 24.642,23.384 r180 top
R109 "R" R0402 24.57,47.732 r180 top
R110 "R" R0402 24.642,24.384 r0 top
R111 "R" R0402 24.57,48.732 r0 top
R200 "R" R0402 22.076,18.171 r90 top
R201 "R" R0402 23.919,15.829 r0 top
R202 "R" R0402 21.128,18.171 r90 top
R203 "R" R0402 25.441,15.381 r270 top
R204 "R" R0402 22.397,15.37 r270 top
R205 "R" R0402 12.416,25.346 r90 top
R206 "R" R0402 23.921,14.925 r180 top
U100 "TPS563201DDCR" TPS563201DDCR 25.497,7.001 r180 top
U101 "TPS563201DDCR" TPS563201DDCR 27.717,31.048 r180 top
U102 "TPS563201DDCR" TPS563201DDCR 30.648,13.609 r180 top
U103 "TPS563201DDCR" TPS563201DDCR 27.709,39.413 r180 top
U104 "TPS563201DDCR" TPS563201DDCR 27.738,23.364 r180 top
U105 "TPS563201DDCR" TPS563201DDCR 27.665,47.711 r180 top
U200 "CH224Q" CH224Q 19.995,15.383 r0 top

## Footprints (in the part's own frame and the unit in brackets; to place one, negate y for a bottom-side part, rotate by r counter-clockwise, add the part's x,y. Pads: shape width x height; smd on the part's side, far side on the other; paste and mask are expansions set on the pad)
C0402 [mm] "Chip Capacitor, 2-Leads, Body 1.00x0.50mm, IPC Medium Density"
  rect 0.58x0.62 smd: 1(-0.48,0) 2(0.48,0)
C0805 [mm] "Chip Capacitor, 2-Leads, Body 2.00x1.25mm, IPC Medium Density"
  rect 1.05x1.45 smd: 1(-0.925,0) 2(0.925,0)
CH224Q [mm] "PSON, 10-Leads, Body 2.00x2.00mm, Pitch 0.40mm, Thermal Pad 1.50x0.85mm, IPC Medium Density"
  rect 0.85x1.5 smd paste-0.195: 0(0,0)
  rrect50% 0.425x0.25 smd: 1(-0.837,0.8) 2(-0.837,0.4) 3(-0.837,0) 4(-0.837,-0.4) 5(-0.837,-0.8) 6(0.838,-0.8) 7(0.838,-0.4) 8(0.838,0) 9(0.838,0.4) 10(0.838,0.8)
  silkscreen extent -0.97,1.06 -0.46,1.06
FXL0420 [mm]
  rrect10% 1.5x2.5 smd: 1(-1.85,0) 2(1.85,0)
FXL0530 [mm]
  rrect10% 1.9x2.5 smd: 1(-2.05,0) 2(2.05,0)
HDR2X5 [mm] "Connector; Header; 5x2 Position"
  rect 1.5x1.5 hole 0.9: 1(-5.08,-1.27)
  round 1.5 hole 0.9: 2(-5.08,1.27) 3(-2.54,-1.27) 4(-2.54,1.27) 5(0,-1.27) 6(0,1.27) 7(2.54,-1.27) 8(2.54,1.27) 9(5.08,-1.27) 10(5.08,1.27)
HL2301A [mm] "SOT23, 3-Leads, Body 2.90x2.40mm, Pitch 0.95mm, IPC Medium Density"
  rrect50% 0.9x0.6 smd: D(1.037,0) G(-1.038,0.95) S(-1.038,-0.95)
KF141R-2.54-2P [mm] "Spring-loaded terminal block"
  rect 1.8x1.8 hole 1.2: 1(-1.27,2.54) 1(-1.27,-2.54)
  round 1.8 hole 1.2: 2(1.27,2.54) 2(1.27,-2.54)
KF141R-2.54-12P [mm] "Spring-loaded terminal block"
  rect 1.8x1.8 hole 1.2: 1(-13.97,-2.54) 1(-13.97,2.54)
  round 1.8 hole 1.2: 2(-11.43,-2.54) 2(-11.43,2.54) 3(-8.89,-2.54) 3(-8.89,2.54) 4(-6.35,-2.54) 4(-6.35,2.54) 5(-3.81,-2.54) 5(-3.81,2.54) 6(-1.27,2.54) 6(-1.27,-2.54) 7(1.27,2.54) 7(1.27,-2.54) 8(3.81,-2.54) 8(3.81,2.54) 9(6.35,-2.54) 9(6.35,2.54) 10(8.89,-2.54) 10(8.89,2.54) 11(11.43,-2.54) 11(11.43,2.54) 12(13.97,-2.54) 12(13.97,2.54)
LED0603 [mm] "Chip LED, 2-Leads, Body 1.60x0.80mm, IPC High Density"
  rect 0.6x0.8 smd: 1(-0.7,0) 2(0.7,0)
MARKPOINT-1.0#1 [mm]
  round 1 smd: ""(0,0)
  round 3 on Top Solder: ""(0,0)
MARKPOINT-1.0#2 [mm]
  round 1 smd: ""(0,0)
  round 3 on Bottom Solder: ""(0,0)
MMSZ4688 [mm] "TSOP, 2-Leads, Body 1.60x2.70mm, Pitch 0.80mm, IPC Medium Density"
  rrect50% 1x1.22 smd: 1(-1.635,0) 2(1.635,0)
POSHOLE-3.2 [mil] "3.2mm hole"
  round 30 smd: ""(-100,0) ""(-70.71,-70.71) ""(-70.71,70.71) ""(0,100) ""(0,-100) ""(70.71,-70.71) ""(70.71,70.71) ""(100,0)
  round 30 smd far side: ""(-100,0) ""(-70.71,-70.71) ""(-70.71,70.71) ""(0,100) ""(0,-100) ""(70.71,-70.71) ""(70.71,70.71) ""(100,0)
  round 0 hole 125.98 unplated: ""(0,0)
  silkscreen extent -125,-125 125,125
R0402 [mm] "Chip Resistor, 2-Leads, Body 1.00x0.50mm, IPC Medium Density"
  rect 0.55x0.55 smd: 1(-0.475,0) 2(0.475,0)
TPS563201DDCR [mm] "SOT23, 6-Leads, Body 2.90x2.80mm, Pitch 0.95mm, IPC High Density"
  rrect50% 1.15x0.55 smd: 1(-1.1,0.95) 2(-1.1,0) 3(-1.1,-0.95) 4(1.1,-0.95) 5(1.1,0) 6(1.1,0.95)
USB-C-16 [mm]
  rect 0.6x1.3 smd: A1B12(-3.2,2.415) A4B9(-2.4,2.415) B1A12(3.2,2.415) B4A9(2.4,2.415)
  rect 0.3x1.3 smd: A5(-1.25,2.415) A6(-0.25,2.415) A7(0.25,2.415) A8(1.25,2.415) B5(1.75,2.415) B6(0.75,2.415) B7(-0.75,2.415) B8(-1.75,2.415)
  oval 1x2.1 hole 0.6 slot 1.7 at 90 deg: EH(-4.32,1.765) EH(4.32,1.765)
  oval 1x1.8 hole 0.6 slot 1.4 at 90 deg: EH(-4.32,-2.415) EH(4.32,-2.415)
  round 0.6 hole 0.65 unplated: ""(-2.89,1.285) ""(2.89,1.285)

## Part data
D200: "ZENER"
Q200: "PMOS"
U100 U101 U102 U103 U104 U105: "BUCK"
U200: "PD3.2"

## Via types
v1: diameter 0.45, hole 0.3, Top Layer to Bottom Layer, tented both sides, 293 vias

## Nets (pads, with @x,y where several pads share a name; then routed paths per layer and width w, separated by ;. In a path a pad name is that pad's centre, name@x,y a point inside that pad or via, vN(x,y) a via of type N, cw(c..) or ccw(c..) an arc to the next point about the centre after c; other vN are vias at no path point)
+1V2: C128.2 C129.2 J204.11 J209.1 J209.3 J209.5 J209.7 J209.9 L105.2 R109.2 | length 17.6
  Top Layer w0.254: R109.2 24.095,46.821 v1(25.22,45.695)
  Bottom Layer w0.254: v1(25.22,45.695) 25.22,45.633 26.47,44.383 35.148,44.383 37.152,46.387 v1(38.945,46.387)
  other v1: 38.945,47.409 38.945,48.431 36.901,49.453 37.923,49.453
+1V5: C118.2 C119.2 J204.9 J208.1 J208.3 J208.5 J208.7 J208.9 L103.2 R105.2 | length 17.6
  Top Layer w0.254: R105.2 24.138,38.5 v1(25.22,37.418)
  Bottom Layer w0.254: v1(25.22,37.418) 25.22,37.378 26.514,36.085 35.191,36.085 37.196,38.089 v1(38.989,38.089)
  other v1: 38.989,39.111 38.989,40.133 36.944,41.155 37.967,41.155
+1V8: C108.2 C109.2 J204.7 J207.1 J207.3 J207.5 J207.7 J207.9 L101.2 R101.2 | length 17.7
  Top Layer w0.254: R101.2 24.146,30.035 v1(25.231,28.951)
  Bottom Layer w0.254: v1(25.231,28.951) 26.462,27.72 35.199,27.72 37.204,29.724 v1(38.997,29.724)
  other v1: 38.997,30.746 38.997,31.768 36.952,32.79 37.975,32.79
+2V5: C124.2 C125.2 J203.1 J203.3 J203.5 J203.7 J203.9 J204.5 L104.2 R108.2 | length 17.6
  Top Layer w0.203: R108.2 24.167,22.392 v1(25.252,21.308)
  Bottom Layer w0.203: v1(25.252,21.308) 26.507,20.053 30.043,20.053 30.772,20.782 37.477,20.782 v1(38.876,22.181)
  other v1: 38.876,23.203 38.876,24.225 36.831,25.247 37.853,25.247
+3V3: C114.2 C115.2 J202.1 J202.3 J202.5 J202.7 J202.9 J204.3 L102.2 R104.2 | length 8.9
  Top Layer w0.203: R104.2 v1@30.876,15.838
  Bottom Layer w0.203: v1(30.879,15.842) 39.057,15.842 v1@39.13,15.914
  other v1: 39.13,12.775 39.13,13.797 39.13,14.82 39.13,15.842
+5V: C104.2 C105.2 J201.1 J201.3 J201.5 J201.7 J201.9 J204.1 L100.2 R100.2 | length 14.8
  Top Layer w0.203: R100.2 25.836,9.668 v1(25.84,9.671)
  Bottom Layer w0.203: v1(25.84,9.671) 33.242,9.671 37.144,5.769 v1(37.144,4.559)
  other v1: 35.1,4.559 36.122,4.559 38.166,4.559 39.188,4.559 39.188,5.581
DM: J200.A7 J200.B7 U200.5 | length 8.6
  Top Layer w0.16: J200.B7 14.257,17.523 14.052,17.318 14.052,16.763 14.292,16.523 J200.A7 16.229,16.523 16.378,16.671 17.065,16.671 18.246,15.491 18.246,14.89 18.481,14.655 18.793,14.655 18.865,14.583 U200.5
DP: J200.A6 J200.B6 U200.4 | length 8
  Top Layer w0.16: v1(14.523,16.023) J200.B6 ; v1(14.523,17.023) J200.A6 16.229,17.023 16.326,16.927 17.171,16.927 18.501,15.596 18.501,14.995 18.586,14.91 18.793,14.91 18.865,14.983 U200.4
  Bottom Layer w0.16: v1(14.523,16.023) 14.317,16.229 14.317,16.816 v1(14.523,17.023)
EN1: R203.2 U100.5 U101.5 U102.5 U103.5 U104.5 U105.5 | length 57.7
  Top Layer w0.203: v1(23.224,7.001) U100.5 ; v1(25.202,46.742) 25.594,47.134 25.594,47.434 25.871,47.711 U105.5 ; v1(25.245,38.444) 25.637,38.836 25.637,39.136 25.915,39.413 U103.5 ; v1(25.253,30.079) 25.645,30.471 25.645,30.771 25.923,31.048 U101.5 ; v1(25.274,22.395) 25.666,22.787 25.666,23.086 25.944,23.364 U104.5 ; R203.2 25.441,14.153 25.985,13.609 U102.5
  Bottom Layer w0.203: v1(23.224,7.001) 23.224,9.705 24.497,10.978 24.497,13.328 v1(25.441,14.271) 24.493,15.219 24.493,22.4 ; v1(25.202,46.742) 24.493,46.033 24.493,38.471 ; v1(25.245,38.444) 24.52,38.444 24.493,38.471 ; v1(25.253,30.079) 24.525,30.079 24.493,30.112 ; v1(25.274,22.395) 24.497,22.395 24.493,22.4 ; 24.493,22.4 24.493,30.112 ; 24.493,30.112 24.493,38.471
GND: C102.1 C103.1 C104.1 C105.1 C106.1 C107.1 C108.1 C109.1 C112.1 C113.1 C114.1 C115.1 C116.1 C117.1 C118.1 C119.1 C122.1 C123.1 C124.1 C125.1 C126.1 C127.1 C128.1 C129.1 C200.1 C201.1 J200.A1B12 J200.B1A12 J200.EH J201.2 J201.4 J201.6 J201.8 J201.10 J202.2 J202.4 J202.6 J202.8 J202.10 J203.2 J203.4 J203.6 J203.8 J203.10 J204.2 J204.4 J204.6 J204.8 J204.10 J204.12 J205.2 J205.4 J205.6 J205.8 J205.10 J206.2 J207.2 J207.4 J207.6 J207.8 J207.10 J208.2 J208.4 J208.6 J208.8 J208.10 J209.2 J209.4 J209.6 J209.8 J209.10 R102.1 R103.1 R106.1 R107.1 R110.1 R111.1 R204.2 R205.2 R206.2 U100.1 U101.1 U102.1 U103.1 U104.1 U105.1 U200.0 | length 4.5
  Top Layer w0.203: R205.2 v1(12.416,26.726)
  Top Layer w0.254: v1(19.915,19.324) C200.1 19.917,18.687 C201.1 v1(19.917,17.073) ; U200.0@19.917,15.46 U200.0 ; v1(22.397,14.26) R204.2 ; v1(23.446,14.29) R206.2
  other v1: 26.384,4.305 27.406,4.305 17.307,4.501 19.807,4.501 22.307,4.501 57.307,4.501 59.807,4.501 26.384,5.259 27.406,5.259 18.557,7.001 21.057,7.001 58.557,7.001 35.064,9.189 35.826,9.189 36.588,9.189 37.35,9.189 38.112,9.189 9.807,9.501 19.807,9.501 22.307,9.501 39.807,9.501 42.307,9.501 44.807,9.501 47.307,9.501 49.807,9.501 52.307,9.501 64.807,9.501 25.84,10.671 31.535,10.914 32.558,10.914 22.355,11.574 23.378,11.574 31.535,11.867 32.558,11.867 13.557,12.001 18.557,12.001 21.057,12.001 56.057,12.001 22.355,12.528 23.378,12.528 16.298,13.004 17.06,13.004 17.822,13.004 9.807,14.501 27.307,14.501 57.307,14.501 62.307,14.501 19.995,15.764 30.879,16.842 11.057,17.001 27.149,17.507 28.171,17.507 27.149,18.461 28.171,18.461 9.807,19.501 39.807,19.501 42.307,19.501 44.807,19.501 47.307,19.501 49.807,19.501 52.307,19.501 54.807,19.501 57.307,19.501 62.307,19.501 35.094,20 35.856,20 36.618,20 37.38,20 38.142,20 28.625,20.668 29.647,20.668 28.625,21.622 29.647,21.622 11.057,22.001 13.557,22.001 21.057,22.001 14.066,22.318 15.019,22.318 15.973,22.318 9.807,24.501 14.807,24.501 17.307,24.501 54.807,24.501 57.307,24.501 62.307,24.501 22.995,24.561 22.995,25.515 30.873,25.711 31.895,25.711 22.995,26.469 29.851,26.664 30.873,26.664 31.895,26.664 11.057,27.001 13.557,27.001 21.057,27.001 38.557,27.001 41.057,27.001 43.557,27.001 46.057,27.001 48.557,27.001 51.057,27.001 36.681,27.775 37.635,27.775 28.604,28.353 29.626,28.353 28.604,29.306 29.626,29.306 9.807,29.501 12.307,29.501 19.807,29.501 22.307,29.501 57.307,29.501 62.307,29.501 11.057,32.001 13.557,32.001 16.057,32.001 18.557,32.001 21.057,32.001 53.557,32.001 22.974,32.246 22.974,33.2 30.852,33.395 31.874,33.395 22.974,34.153 29.829,34.349 30.852,34.349 31.874,34.349 9.807,34.501 12.307,34.501 17.307,34.501 39.807,34.501 42.307,34.501 44.807,34.501 47.307,34.501 49.807,34.501 52.307,34.501 62.307,34.501 36.673,36.14 37.627,36.14 28.596,36.718 29.618,36.718 11.057,37.001 16.057,37.001 21.057,37.001 38.557,37.001 56.057,37.001 28.596,37.671 29.618,37.671 12.307,39.501 14.807,39.501 17.307,39.501 19.807,39.501 22.307,39.501 62.307,39.501 22.966,40.611 22.966,41.565 30.843,41.76 31.866,41.76 61.057,42.001 63.557,42.001 22.966,42.518 29.821,42.714 30.843,42.714 31.866,42.714 36.63,44.438 37.584,44.438 9.807,44.501 12.307,44.501 14.807,44.501 17.307,44.501 19.807,44.501 22.307,44.501 39.807,44.501 42.307,44.501 44.807,44.501 47.307,44.501 49.807,44.501 59.807,44.501 62.307,44.501 64.807,44.501 28.552,45.016 29.575,45.016 28.552,45.969 29.575,45.969 16.057,47.001 18.557,47.001 21.057,47.001 56.057,47.001 22.923,48.909 17.307,49.501 19.807,49.501 54.807,49.501 57.307,49.501 22.923,49.863 30.8,50.058 31.822,50.058 22.923,50.816 29.778,51.012 30.8,51.012 31.822,51.012
NetC100_1: C100.1 U100.6 | length 1.3
  Top Layer w0.508: C100.1 24.321,5.975 U100.6
NetC100_2: C100.2 L100.1 U100.2
NetC101_1: C101.1 U101.6 | length 1.2
  Top Layer w0.508: C101.1 U101.6@26.587,29.912
NetC101_2: C101.2 L101.1 U101.2
NetC110_1: C110.1 U102.6 | length 1.2
  Top Layer w0.508: C110.1@29.472,11.393 U102.6@29.472,12.583
NetC110_2: C110.2 L102.1 U102.2
NetC111_1: C111.1 U103.6 | length 1.2
  Top Layer w0.508: C111.1@26.579,37.087 U103.6@26.579,38.277
NetC111_2: C111.2 L103.1 U103.2
NetC120_1: C120.1 U104.6 | length 1.2
  Top Layer w0.508: C120.1 U104.6@26.587,22.263
NetC120_2: C120.2 L104.1 U104.2
NetC121_1: C121.1 U105.6 | length 1.2
  Top Layer w0.508: C121.1@26.535,45.385 U105.6@26.535,46.575
NetC121_2: C121.2 L105.1 U105.2
NetD200_2: D200.2 Q200.G R200.2 R202.2
NetD201_1: D201.1 R205.1 | length 1.1
  Top Layer w0.203: R205.1 13.251,24.871 D201.1
NetD201_2: D201.2 Q200.D R201.2 R203.1 R206.1 | length 16.3
  Top Layer w0.203: D201.2 19.122,26.092 25.72,19.495 Q200.D
NetJ200_A5: J200.A5 U200.7 | length 8
  Top Layer w0.358: v1(20.351,13.483) 20.771,13.483 21.331,14.043 21.331,14.763
  Bottom Layer w0.358: v1(16.693,18.025) 20.351,14.368 v1(20.351,13.483)
NetJ200_B5: J200.B5 U200.6 | length 5.8
  Top Layer w0.358: v1(19.431,13.475) 20.092,14.136 20.521,14.136
  Bottom Layer w0.358: v1(16.807,15.946) 17.118,16.257 17.509,16.257 19.431,14.335 v1(19.431,13.475)
NetR100_1: R100.1 R102.2 U100.4 | length 2.7
  Top Layer w0.203: R102.2 R100.1 24.222,8.126 U100.4@24.31,8.039
NetR101_1: R101.1 R103.2 U101.4 | length 2.5
  Top Layer w0.203: R101.1 R103.2 ; R103.2@25.167,31.998 U101.4
NetR104_1: R104.1 R106.2 U102.4 | length 2.6
  Top Layer w0.203: R106.2 R104.1 29.262,14.559 U102.4
NetR105_1: R105.1 R107.2 U103.4 | length 2.5
  Top Layer w0.203: R105.1 R107.2 ; R107.2@25.158,40.363 U103.4
NetR108_1: R108.1 R110.2 U104.4 | length 2.5
  Top Layer w0.203: R108.1 R110.2 25.188,24.314 U104.4
NetR109_1: R109.1 R111.2 U105.4 | length 2.5
  Top Layer w0.203: R109.1 R111.2 ; R111.2@25.115,48.661 U105.4
NetR202_1: R202.1 U200.10 | length 1.6
  Top Layer w0.152: U200.10 20.833,16.765 21.128,17.06 R202.1
NetR204_1: R204.1 U200.9 | length 1.6
  Top Layer w0.152: U200.9 21.33,15.783 21.462,15.915 22.328,15.915 R204.1
VBUS: C102.2 C103.2 C106.2 C107.2 C112.2 C113.2 C116.2 C117.2 C122.2 C123.2 C126.2 C127.2 C200.2 C201.2 D200.1 J200.A4B9 J200.B4A9 J205.1 J205.3 J205.5 J205.7 J205.9 J206.1 Q200.S R200.1 R201.1 U100.3 U101.3 U102.3 U103.3 U104.3 U105.3 U200.1 U200.8 | length 1
  Top Layer w0.254: U200.8 21.647,15.383 v1(21.743,15.479)
  other v1: 27.364,11.52 28.386,11.52 27.364,12.474 28.386,12.474 16.663,14.367 17.425,14.367 17.425,15.129 22.232,16.805 22.881,16.805 32.553,17.742 33.575,17.742 32.553,18.696 33.575,18.696 17.118,19.503 18.072,19.503 17.118,20.525 18.072,20.525 17.118,21.547 18.072,21.547 17.118,22.569 18.072,22.569 19.026,22.569 28.981,24.961 27.584,25.009 28.258,25.684 27.535,26.406 28.96,32.645 27.563,32.693 28.237,33.368 27.514,34.091 28.952,41.01 27.554,41.058 28.229,41.733 27.506,42.456 28.908,49.308 27.511,49.356 28.185,50.031 27.463,50.754
pads on no net: J200. J200.A8 J200.B8 MARKPOINT300. MARKPOINT301. MARKPOINT302. MARKPOINT303. POSHOLE300. POSHOLE301. POSHOLE302. POSHOLE303. U200.2 U200.3

## Polygon pours and split planes (outlines as drawn)
GND on Bottom Layer "GND_L04_P000" (solid, remove dead copper, pour order 0): 8.576,6.782 8.576,48.782 cw(c12.576,48.782) 12.576,52.782 62.576,52.782 cw(c62.576,48.782) 66.576,48.782 66.576,6.782 cw(c62.576,6.782) 62.576,2.782 12.576,2.782 cw(c12.576,6.782)
GND on Top Layer "GND_L01_P001" (solid, remove dead copper, pour order 1): 8.576,6.782 8.576,48.782 cw(c12.576,48.782) 12.576,52.782 62.576,52.782 cw(c62.576,48.782) 66.576,48.782 66.576,6.782 cw(c62.576,6.782) 62.576,2.782 12.576,2.782 cw(c12.576,6.782)
VBUS on PWR (split plane): 33.82,49.301 30.394,49.301 30.394,44.902 33.82,44.902 33.82,41.003 30.437,41.003 30.437,36.604 33.82,36.604 33.82,32.638 30.445,32.638 30.445,28.239 33.82,28.239 33.82,24.954 30.466,24.954 30.466,20.554 33.82,20.554 33.82,15.63 33.297,15.63 33.297,11.23 33.82,11.23 33.82,9.482 27.823,9.482 27.823,4.185 33.82,4.185 33.82,3.293 12.347,3.293 11.894,3.353 11.452,3.471 11.029,3.646 10.633,3.875 10.27,4.153 9.947,4.477 9.668,4.84 9.44,5.236 9.265,5.658 9.146,6.1 9.086,6.554 9.086,6.782 9.086,48.782 9.086,49.011 9.146,49.465 9.265,49.906 9.44,50.329 9.668,50.725 9.947,51.088 10.27,51.412 10.633,51.69 11.029,51.919 11.452,52.094 11.894,52.212 12.347,52.272 33.82,52.272
GND on PWR (split plane): 63.258,52.212 63.7,52.094 64.123,51.919 64.519,51.69 64.882,51.412 65.205,51.088 65.484,50.725 65.712,50.329 65.887,49.906 66.006,49.465 66.066,49.011 66.066,48.782 66.066,6.782 66.066,6.554 66.006,6.1 65.887,5.658 65.712,5.236 65.484,4.84 65.205,4.477 64.882,4.153 64.519,3.875 64.123,3.646 63.7,3.471 63.258,3.353 62.805,3.293 34.586,3.293 34.586,11.23 38.499,11.23 38.499,15.63 34.586,15.63 34.586,20.554 35.669,20.554 35.669,24.954 34.586,24.954 34.586,28.239 35.648,28.239 35.648,32.638 34.586,32.638 34.586,36.604 35.639,36.604 35.639,41.003 34.586,41.003 34.586,44.902 35.596,44.902 35.596,49.301 34.586,49.301 34.586,52.272 62.805,52.272
GND on GND (split plane): 63.258,52.212 63.7,52.094 64.123,51.919 64.519,51.69 64.882,51.412 65.205,51.088 65.484,50.725 65.712,50.329 65.887,49.906 66.006,49.465 66.066,49.011 66.066,48.782 66.066,6.782 66.066,6.554 66.006,6.1 65.887,5.658 65.712,5.236 65.484,4.84 65.205,4.477 64.882,4.153 64.519,3.875 64.123,3.646 63.7,3.471 63.258,3.353 62.805,3.293 12.347,3.293 11.894,3.353 11.452,3.471 11.029,3.646 10.633,3.875 10.27,4.153 9.947,4.477 9.668,4.84 9.44,5.236 9.265,5.658 9.146,6.1 9.086,6.554 9.086,6.782 9.086,48.782 9.086,49.011 9.146,49.465 9.265,49.906 9.44,50.329 9.668,50.725 9.947,51.088 10.27,51.412 10.633,51.69 11.029,51.919 11.452,52.094 11.894,52.212 12.347,52.272 62.805,52.272

## Other copper
Top Layer:
  rectangle net NetJ200_A5: 15.499,17.873 16.693,18.173
Bottom Layer:
  text "https://github.com/miaow-cn/pwrhub-hw" at 18.98,25.357 h1
GND (plane layer: these items are gaps in the copper):
  lines w1.016: 8.576,6.52 8.644,6 8.78,5.494 8.981,5.009 9.243,4.555 9.562,4.139 9.933,3.769 10.349,3.449 10.803,3.187 11.287,2.987 11.794,2.851 12.314,2.782 62.838,2.782 63.358,2.851 63.864,2.987 64.349,3.187 64.803,3.449 65.219,3.769 65.59,4.139 65.909,4.555 66.171,5.009 66.372,5.494 66.508,6 66.576,6.52 66.576,6.782 66.576,48.782 66.576,49.045 66.508,49.564 66.372,50.071 66.171,50.555 65.909,51.009 65.59,51.425 65.219,51.796 64.803,52.115 64.349,52.378 63.864,52.578 63.358,52.714 62.838,52.782 12.314,52.782 11.794,52.714 11.287,52.578 10.803,52.378 10.349,52.115 9.933,51.796 9.562,51.425 9.243,51.009 8.981,50.555 8.78,50.071 8.644,49.564 8.576,49.045 8.576,48.782 8.576,6.782 8.576,6.52
PWR (plane layer: these items are gaps in the copper):
  lines w0.762: 34.203,2.699 34.203,52.608
  lines w1.016: 8.576,6.52 8.644,6 8.78,5.494 8.981,5.009 9.243,4.555 9.562,4.139 9.933,3.769 10.349,3.449 10.803,3.187 11.287,2.987 11.794,2.851 12.314,2.782 62.838,2.782 63.358,2.851 63.864,2.987 64.349,3.187 64.803,3.449 65.219,3.769 65.59,4.139 65.909,4.555 66.171,5.009 66.372,5.494 66.508,6 66.576,6.52 66.576,6.782 66.576,48.782 66.576,49.045 66.508,49.564 66.372,50.071 66.171,50.555 65.909,51.009 65.59,51.425 65.219,51.796 64.803,52.115 64.349,52.378 63.864,52.578 63.358,52.714 62.838,52.782 12.314,52.782 11.794,52.714 11.287,52.578 10.803,52.378 10.349,52.115 9.933,51.796 9.562,51.425 9.243,51.009 8.981,50.555 8.78,50.071 8.644,49.564 8.576,49.045 8.576,48.782 8.576,6.782 8.576,6.52

## Silkscreen, mask and mechanical layers (free items; w line width, h text height)
Top Overlay:
  text "GND" at 54.7,49.661 h1.52
  text "GND" at 16.869,44.985 h1.52
  text "GND" at 42.007,44.063 h1.52
  text "1V2" at 47.765,44.06 h1.52
  text "G" at 54.699,39.485 h1.52 r90
  text "12V" at 14.568,37.834 h1.52
  text "1V2" at 54.7,36.329 h1.52 r90
  text "1V5" at 42.283,35.588 h1.52
  text "GND" at 47.426,35.588 h1.52
  text "G" at 54.699,34.405 h1.52 r90
  text "1V5" at 54.692,31.24 h1.52 r90
  text "G" at 54.699,29.325 h1.52 r90
  text "GND" at 9.164,28.007 h1.52
  text "GND" at 42.007,27.114 h1.52
  text "1V8" at 47.759,27.126 h1.52
  text "1V8" at 54.692,26.163 h1.52 r90
  text "G" at 54.699,24.245 h1.52 r90
  text "2V5" at 54.692,21.025 h1.52 r90
  text "G" at 54.699,19.165 h1.52 r90
  text "2V5" at 42.282,18.639 h1.52
  text "GND" at 47.426,18.639 h1.52
  text "3V3" at 54.691,15.959 h1.52 r90
  text "G" at 54.699,14.085 h1.52 r90
  text "5V" at 54.69,11.291 h1.52 r90
  text "GND" at 42.007,10.164 h1.52
  text "3V3" at 47.715,10.178 h1.52
  text "5V" at 54.7,4.703 h1.52
Mechanical 1:
  the board outline again, w0.025